# Altium PCB CH32V205RCT-R0.PcbDoc (part 2 of 2)
Units mil, origin at the board's own origin, x right, y up, seen from the top; angles counter-clockwise.
Board outline 3070.87 x 2755.91 mil, 2 copper layers (Top Layer, Bottom Layer); 61 components, 79 nets, 328 pads, 508 vias.
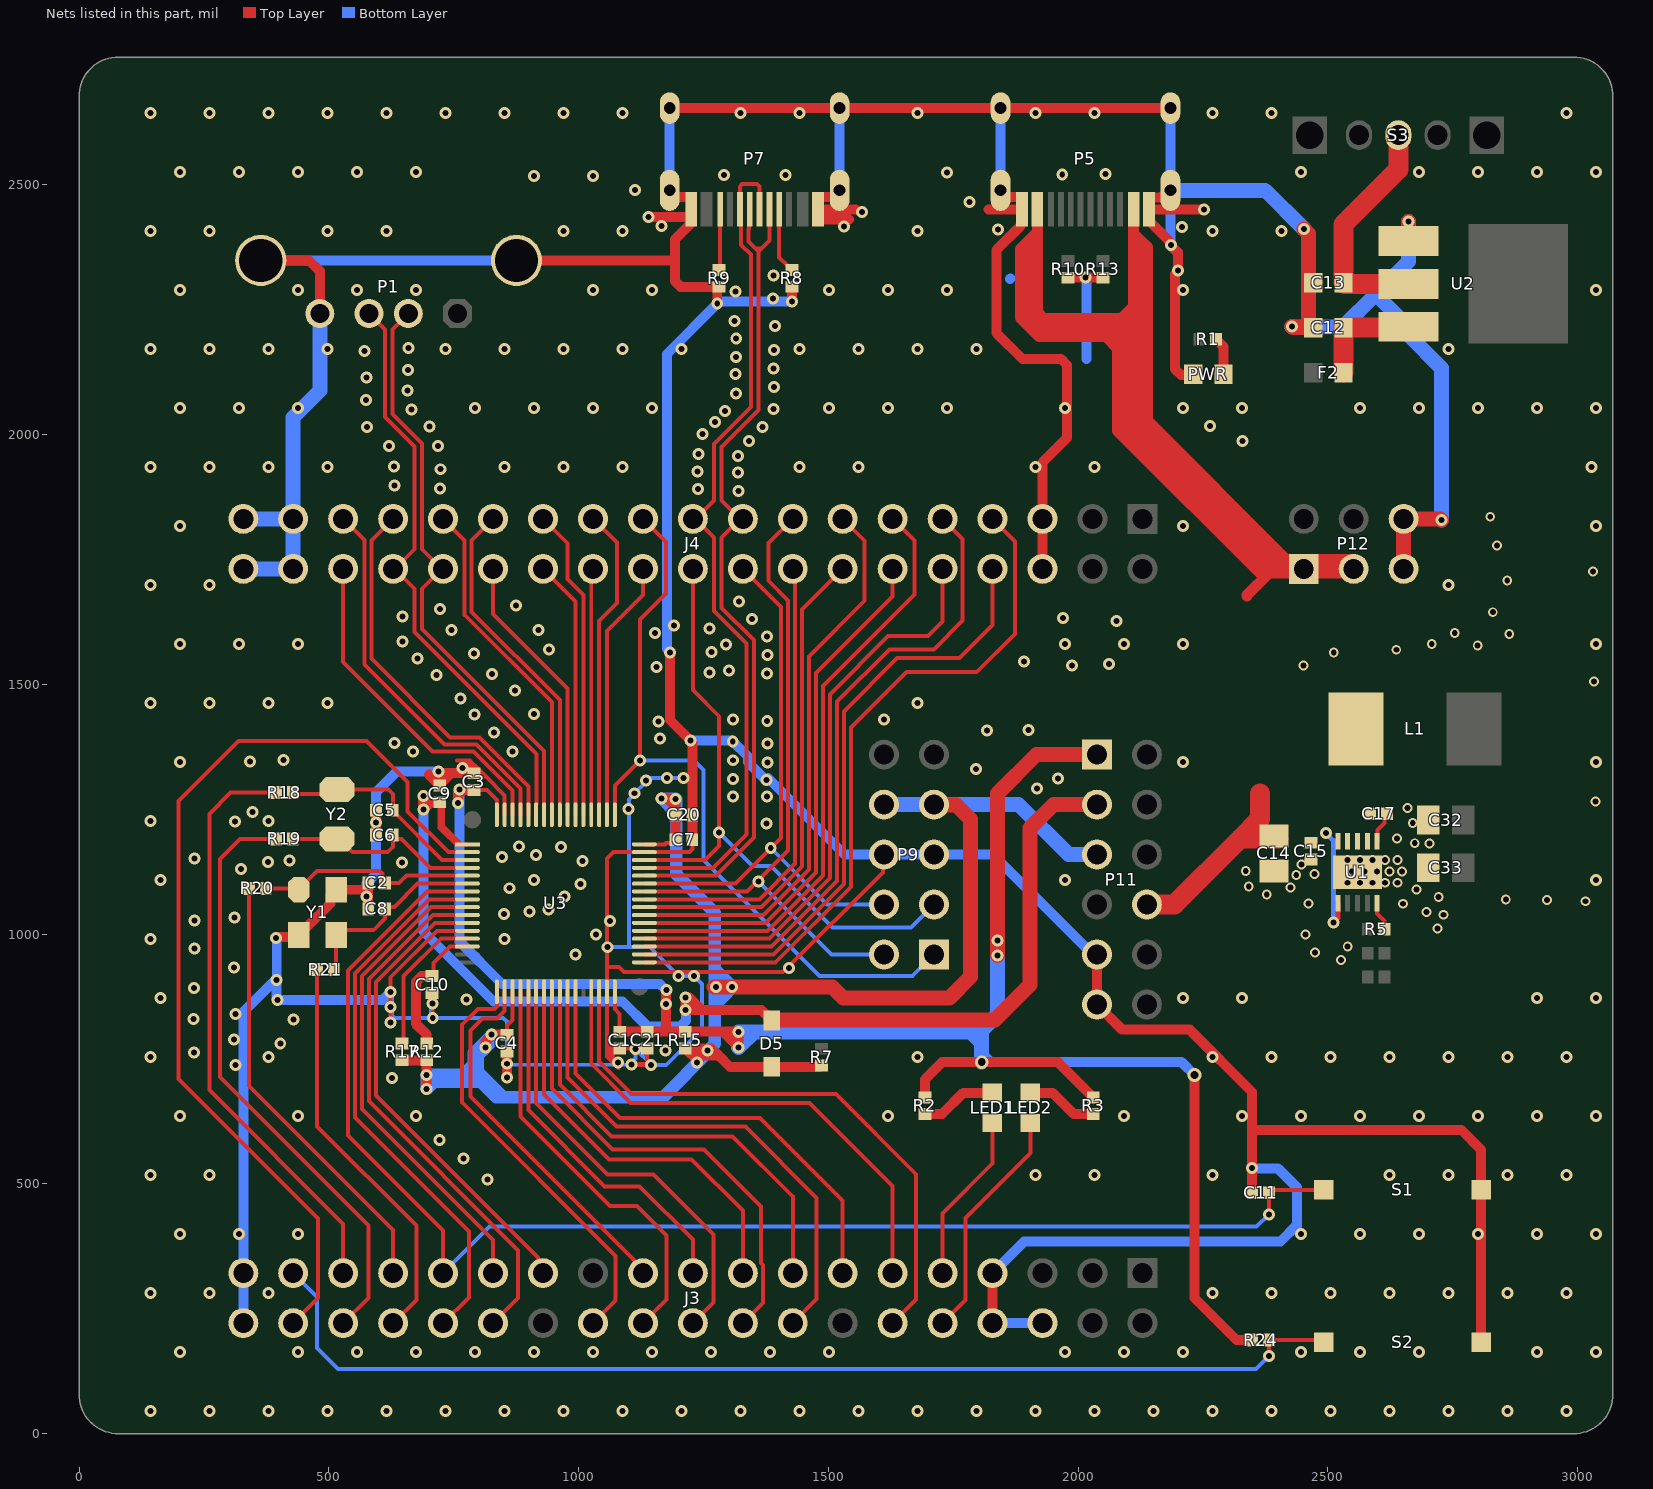
[diagram p2: the nets of this part, all layers, seen from the top]

## Via types
v1: diameter 24, hole 12, Top Layer to Bottom Layer, tented both sides, 451 vias
v2: diameter 19.68, hole 11.81, Top Layer to Bottom Layer, tented both sides, 55 vias
v3: diameter 27.56, hole 15.75, Top Layer to Bottom Layer, tented both sides, 2 vias

## Nets (pads, with @x,y where several pads share a name; then routed paths per layer and width w, separated by ;. In a path a pad name is that pad's centre, name@x,y a point inside that pad or via, vN(x,y) a via of type N, cw(c..) or ccw(c..) an arc to the next point about the centre after c; other vN are vias at no path point) (continued)
GND: C1.1 C2.1 C3.1 C4.1 C5.2 C6.2 C7.1 C8.1 C9.2 C10.2 C11.1 C12.2 C13.2 C14.1 C15.1 C20.2 C21.1 C32.1 C33.1 J3.6 J3.7 J3.8 J3.37 J3.38 J4.5 J4.6 J4.35 J4.36 J4.37 J4.38 P1.0 P1.4 P5.0 P5.A1 P5.B1 P7.0 P7.A1 P7.B1 P9.5 P9.6 P11.9 P11.11 P12.5 P12.6 PWR.2 R5.1 R8.1 R9.1 R10.2 R13.2 S1.2 S2.2 U1.0 U1.5 U2.1 U3.12 U3.31 U3.47 U3.63 Y1.2 Y1.4 | length 18960.8
  Top Layer w8: v1(624.01,823.15) v1(624.01,853.77) v1(624.01,884.38) 624.01,913.71 717.02,1006.72 U3.12@777.42,1006.72 ; C10.2@706.71,882.46 C10.2@707.71,881.46 ; v1(707.35,860.76) 707.35,881.09 C10.2@707.71,881.46 ; C10.2@707.97,881.71 C10.2@707.71,881.46 ; v1(708.16,832.46) 708.16,881.01 C10.2@707.71,881.46 ; 756.7,1347.7 782.44,1347.7 788.13,1342.01 ; v1@765.74,1342.01 788.13,1342.01 ; v1@777.11,1335.81 794.33,1335.81 ; C3.1@787.71,1315.39 788.05,1315.73 814.41,1315.73 ; C3.1@790.46,1322.14 808,1322.14 ; U3.63@852.23,1239.01 852.23,1277.91 814.41,1315.73 ; 1067.58,773.78 1064.67,776.7 ; v1@1068.79,747.24 1069.09,747.54 1069.09,771.21 ; v1@1070.8,744.12 1062.75,752.16 1062.75,770.09 1061.64,771.21 ; C1.1@1077.54,778.11 1076.13,776.7 1064.67,776.7 ; v1@1079.57,732.02 1056.95,754.64 1056.95,775.9 ; v1(1144.92,737.57) 1144.92,741.9 1137.46,749.36 C21.1@1137.46,771.21 C1.1@1082.46,771.21 1069.09,771.21 ; v1(1200.38,916.27) 1204.71,916.27 1212.44,924 ; C7.1@1227.83,1188.79 1227.83,1170.07 1221.97,1164.2 U3.47@1131.75,1164.2 1069.64,1164.2 1056.95,1151.52 1056.95,934.52 ; P9.6@1611.51,1159.23 1609.25,1156.97 1609.25,1123.63 1409.62,924 1212.44,924 ; U1.5@2598.69,1061.67 2598.69,1040.94 2613.15,1026.49 R5.1@2613.15,1011.14 ; 788.13,1342.01 794.33,1335.81 ; 794.33,1335.81 808,1322.14 ; 808,1322.14 814.41,1315.73 ; 1056.95,775.9 1056.95,784.42 ; 1056.95,775.9 1061.64,771.21 ; 1056.95,784.42 U3.31@1056.95,884.68 1056.95,934.52 ; 1056.95,784.42 1064.67,776.7 ; 1056.95,934.52 1080.85,934.52 1091.36,924 1212.44,924 ; 1061.64,771.21 1069.09,771.21
  Top Layer w10: v1(1106.26,738.93) 1143.56,738.93 v1(1144.92,737.57)
  Top Layer w20: P1.0@363.95,2348.74 460.68,2348.74 482.06,2327.36 P1.4@482.06,2242.44 ; v1(393.91,992.72) 394.99,992.72 396.66,994.4 436.18,994.4 Y1.2@440.12,998.34 ; Y1.2@440.12,1002.27 451.77,1013.93 455.71,1013.93 503.27,1061.48 503.27,1077.23 Y1.4@514.92,1088.89 576.83,1088.89 577.12,1089.18 ; v1(575.87,1075.34) 575.87,1076.42 577.12,1077.67 577.12,1089.18 ; C8.1@578.93,1050.5 C2.1@578.93,1102.49 577.12,1100.68 577.12,1089.18 ; C6.2@594.63,1198.4 v1(594.63,1223.31) C5.2@594.63,1248.23 ; 700.19,1319.34 719.21,1300.33 719.21,1299.34 721.02,1297.53 C9.2@721.54,1297.53 ; C3.1@790.46,1322.14 744.8,1322.14 ; v1(856.51,713.19) 856.6,713.28 v1(856.6,740.55) C4.1@856.6,765.34 ; P1.0@875.77,2348.74 1192.35,2348.74 1192.74,2349.13 ; v1(1140.16,2435.5) P7.B1@1223.76,2435.5 ; P7.0@1182.46,2489.01 1182.46,2484.21 1191.4,2475.27 1223.76,2475.27 P7.B1@1223.76,2449.01 ; P7.0@1182.46,2653.57 P7.0@1522.61,2653.57 P5.0@1844.77,2653.57 P5.0@2184.93,2653.57 ; v1(1183.15,1563.78) 1183.15,1428.76 v1(1224.25,1387.66) 1224.25,1386.58 1227.85,1382.98 C7.1@1227.83,1188.79 ; v1(1277.7,2262.49) 1277.7,2292.38 1278.5,2293.18 1278.5,2294.17 R9.1@1280.31,2295.98 ; R9.1@1281.3,2295.98 R9.1@1280.31,2295.98 ; v1(1427.3,2266.14) R8.1@1427.3,2295.98 ; P7.0@1522.61,2489.01 1522.61,2484.21 1513.67,2475.27 1481.31,2475.27 1479.5,2473.46 P7.A1@1479.5,2450.82 ; 1541.58,2430.78 1481.31,2430.78 1479.5,2432.59 P7.A1@1479.5,2450.82 ; 1554.8,2450.82 P7.A1@1479.5,2450.82 ; 1821.15,2450.82 P5.B1@1887.88,2450.82 ; J3.8@1828.86,221.33 J3.7@1828.86,321.33 ; P5.0@1844.77,2489.01 1844.77,2484.21 1853.72,2475.27 1886.07,2475.27 1887.88,2473.46 P5.B1@1887.88,2450.82 ; J4.6@1928.86,1731.33 J4.5@1928.86,1831.33 1928.86,1944.52 1978.02,1993.69 1978.02,2048.05 1975.05,2051.02 1975.05,2051.79 1976.13,2052.87 1975.05,2053.95 1975.05,2054.72 1978.02,2057.69 1978.02,2139.48 1966.31,2151.19 1888.72,2151.19 1836.83,2203.09 1836.83,2369.98 1886.07,2419.22 1886.07,2449.01 P5.B1@1887.88,2450.82 ; R10.2@1979.85,2314.05 v1(2014.85,2314.05) R13.2@2049.85,2314.05 ; P11.9@2037.77,959.23 P11.11@2037.77,859.23 2088.25,808.75 2223.6,808.75 2348.37,683.98 2348.37,607.9 ; P5.0@2167.41,2476.41 2166.16,2475.16 2143.63,2475.16 2141.82,2473.35 P5.A1@2141.82,2450.82 ; PWR.2@2230.68,2121.02 2224.15,2121.02 2222.37,2119.24 2205.8,2119.24 2194.09,2130.95 2194.09,2321.52 2199.59,2327.02 2199.59,2364.38 2186.49,2377.48 2186.49,2380.09 2187.03,2380.63 2185.5,2380.63 2184.96,2381.17 2184.96,2385.04 2143.63,2426.37 2143.63,2449.01 P5.A1@2141.82,2450.82 ; v1(2251.87,2450.82) P5.A1@2141.82,2450.82 ; C11.1@2348.57,482.24 2348.37,482.45 v1(2348.37,531.83) 2348.37,607.9 ; S2.2@2807.07,182.96 S1.2@2807.07,488.17 2807.07,568.18 2767.34,607.9 2348.37,607.9 ; C9.2@721.54,1297.53 C9.2@722,1297.53 722.99,1297.53 724.8,1299.34 724.8,1302.14 744.8,1322.14 ; C9.2@721.54,1297.53 719.73,1299.34 v1(719.73,1325.34) 720.81,1325.34 724.01,1322.14 744.8,1322.14 ; 1192.74,2349.13 1192.74,2390.56 1223.76,2421.58 P7.B1@1223.76,2435.5 ; 1192.74,2349.13 1192.74,2307.7 1204.45,2295.98 R9.1@1280.31,2295.98 ; P7.B1@1223.76,2435.5 P7.B1@1223.76,2449.01 ; P7.B1@1223.76,2435.5 1225.57,2437.31 P7.B1@1225.57,2450.82 P7.B1@1223.76,2449.01
  Top Layer w30: v1(2427.8,2216.27) 2430.01,2214.06 2461.23,2214.06 2461.23,2402.27 v1(2452.09,2411.4) ; P12.5@2651.79,1731.33 P12.6@2651.79,1831.33 2725.14,1831.33 v1(2727.6,1828.87) ; U2.1@2661.23,2387.95 v1(2661.23,2426.51)
  Bottom Layer w8: v1@624.01,882.38 627.07,879.32 627.07,836.89 631.75,832.2 v1@704.54,832.2 ; v1@705.1,831.65 v1@704.54,832.2 ; v1(707.35,860.76) 704.29,857.7 704.29,832.46 v1@704.54,832.2 ; v1(708.16,832.46) 849.07,832.46 856.6,824.93 v1(856.6,740.55) 858.6,738.55 1105.89,738.55 1105.89,742.88 1114.19,751.19 v1(1114.19,770.39) 1147.01,737.57 1175.04,737.57 1247.09,809.62 1247.09,900.1 v1(1230.7,916.49) 1200.6,916.49 v1(1200.38,916.27) 1142.86,973.78 1100.65,973.78 ; v1(1058.43,973.78) 1100.65,973.78 ; v1(1209.7,1312.57) v1(1177.2,1312.57) 1144.58,1312.57 1136.88,1304.87 1135.12,1304.87 v1(1112.32,1282.06) 1112.32,1281.05 1100.65,1269.38 1100.65,973.78
  Bottom Layer w20: J3.38@328.86,221.33 J3.37@328.86,321.33 328.86,844.17 v1@394.22,909.53 ; P1.0@363.95,2348.74 P1.0@875.77,2348.74 ; v1(393.91,992.72) 394.67,991.96 394.67,989.13 395.87,987.93 v1@395.87,909.41 ; v1(395.64,908.1) 395.64,870.71 397.03,869.32 v1(397.03,868.23) 607.85,868.23 v1(624.01,884.38) ; v1(575.87,1075.34) 575.87,1101.38 594.63,1120.15 v1(594.63,1223.31) 594.63,1283.98 635.99,1325.34 v1(719.73,1325.34) ; P7.0@1182.46,2489.01 P7.0@1182.46,2653.57 ; v1(1183.15,1563.78) 1183.15,1564.86 1176.84,1571.17 1176.84,2161.63 v1(1277.7,2262.49) 1281.35,2266.14 v1(1427.3,2266.14) ; v1(1224.25,1387.66) 1305.86,1387.66 1307.64,1385.88 v1(1308.72,1385.88) 1339.05,1355.55 1339.05,1344.29 v1@1375.07,1308.28 ; v1@1379.13,1312.34 1532.24,1159.23 P9.6@1611.51,1159.23 P9.5@1711.51,1159.23 1829.39,1159.23 2029.39,959.23 P11.9@2037.77,959.23 P11.11@2037.77,859.23 ; P7.0@1522.61,2489.01 P7.0@1522.61,2653.57 ; J3.8@1828.86,221.33 J3.6@1928.86,221.33 ; J3.7@1828.86,321.33 1892.08,384.54 2405.16,384.54 2437.79,417.18 2437.79,493.32 2400.64,530.47 2349.72,530.47 v1(2348.37,531.83) ; P5.0@1844.77,2489.01 P5.0@1844.77,2653.57 P5.0@2184.93,2653.57 P5.0@2184.93,2489.01 2184.93,2379.03 2199.59,2364.38 v1(2199.59,2328.11) ; 1863.35,2311.84 1864.37,2312.86 ; v1@2012.58,2312.86 2013.77,2314.05 v1(2014.85,2314.05) 2014.85,2312.96 2017.12,2310.7 2017.12,2151.19
  Bottom Layer w30: J4.38@328.86,1731.33 J4.36@428.86,1731.33 J4.35@428.86,1831.33 ; J4.37@328.86,1831.33 J4.35@428.86,1831.33 ; P1.4@482.06,2242.44 482.06,2087.95 428.86,2034.74 J4.35@428.86,1831.33 ; P5.0@2184.93,2489.01 2374.49,2489.01 v1(2452.09,2411.4) ; v1(2427.8,2216.27) 2428.55,2215.52 2530.55,2215.52 2595.89,2280.85 ; P12.5@2651.79,1731.33 P12.6@2651.79,1831.33 ; v1(2661.23,2426.51) 2661.23,2346.19 2595.89,2280.85 ; v1(2727.6,1828.87) 2727.6,2133.06 2661.75,2198.91 2661.75,2215 2595.89,2280.85
  other v1: 143.58,45 261.69,45 379.8,45 497.91,45 616.02,45 734.13,45 852.24,45 970.35,45 1088.46,45 1206.57,45 1324.68,45 1442.79,45 1560.9,45 1679.01,45 1797.12,45 1915.23,45 2033.34,45 2151.45,45 2269.56,45 2387.67,45 2505.78,45 2623.89,45 2742,45 2860.11,45 2978.22,45 202.63,163.11 438.85,163.11 556.96,163.11 675.07,163.11 793.19,163.11 911.3,163.11 1029.41,163.11 1147.52,163.11 1265.63,163.11 1383.74,163.11 1501.85,163.11 1974.29,163.11 2092.4,163.11 2210.51,163.11 2446.73,163.11 2564.84,163.11 2682.95,163.11 2919.17,163.11 3037.28,163.11 143.58,281.22 261.69,281.22 379.8,281.22 2269.56,281.22 2387.67,281.22 2505.78,281.22 2623.89,281.22 2742,281.22 2860.11,281.22 2978.22,281.22 202.63,399.33 320.74,399.33 438.85,399.33 2446.73,399.33 2564.84,399.33 2682.95,399.33 2801.06,399.33 2919.17,399.33 3037.28,399.33 817.91,508.79 143.58,517.44 261.69,517.44 1915.23,517.44 2033.34,517.44 2269.56,517.44 2623.89,517.44 2742,517.44 2860.11,517.44 2978.22,517.44 769.64,551.02 721.98,587.83 202.63,635.55 438.85,635.55 675.07,635.55 1619.96,635.55 2092.4,635.55 2328.62,635.55 2446.73,635.55 2564.84,635.55 2682.95,635.55 2801.06,635.55 2919.17,635.55 3037.28,635.55 626.93,712.04 312.99,738.13 1079.48,743.07 143.58,753.66 379.8,753.66 1679.01,753.66 2269.56,753.66 2387.67,753.66 2505.78,753.66 2623.89,753.66 2742,753.66 2860.11,753.66 2978.22,753.66 230.6,763.26 1173.84,766.98 402.88,781.08 310.61,789.29 429.76,829.03 229.48,829.99 312.99,840.06 775.97,868.7 163.33,871.77 2210.51,871.77 2328.62,871.77 2919.17,871.77 3037.28,871.77 230.23,891.87 1421.05,931.98 310.21,933.26 994.27,959.16 230.97,971.27 143.58,989.88 852.24,989.88 1034.91,999.06 1063.24,1026.65 230.97,1027.19 311.57,1032.99 850.35,1040.81 901.43,1045.66 940.21,1049.76 972.27,1075.49 861.54,1091.89 1003.96,1100.09 163.33,1107.99 911.3,1107.99 1974.29,1107.99 3037.28,1107.99 324.62,1130.07 646.95,1143.01 378.56,1144.74 1007.69,1146.33 421.28,1147.76 231.49,1151.53 847,1154.53 914.48,1158.26 965.19,1174.66 881.3,1175.78 1376.7,1221.58 312.01,1225.25 143.58,1226.1 379.8,1226.1 347.23,1244.33 1100.17,1250.77 1309.5,1275.6 1377,1275.2 1917.81,1291.96 1134.78,1307.1 1376.07,1308.28 1309.56,1310.28 1960.13,1311.42 1795.23,1330.61 767.67,1332.14 1378.39,1343.88 202.63,1344.21 2210.51,1344.21 3037.28,1344.21 342.78,1345.36 409.86,1348.61 1309.2,1348.12 668.4,1365.57 867.43,1365.83 1378.39,1381.39 631.79,1382.33 1163.57,1391.58 831.08,1403.48 1817.9,1407.94 1900.46,1409.1 1159.89,1426.1 1377.78,1427.02 1309.2,1429.45 1611.51,1429.45 791.97,1439.91 910.9,1440.93 143.58,1462.32 261.69,1462.32 379.8,1462.32 497.91,1462.32 1679.01,1462.32 763.46,1471.44 872.44,1487.64 715.95,1518.96 826.65,1520.61 1376.88,1522.08 1262.47,1523.77 1301.28,1527.82 1155.75,1535.19 1988.26,1538.17 2061.51,1541.08 1891.74,1545.73 677.93,1551.35 1378.57,1559.21 790.93,1561.82 1265.85,1565.28 940.69,1570.25 1295.55,1579.79 202.63,1580.43 320.74,1580.43 438.85,1580.43 1974.29,1580.43 2092.4,1580.43 2210.51,1580.43 3037.28,1580.43 647.15,1585.63 1376.88,1595.99 1153.44,1602.38 746.05,1608.53 919.69,1608.54 1262.13,1612.19 1190.73,1617.57 2076.63,1627.13 1346.84,1630.75 1970.23,1632.94 647.15,1636 722.24,1650.65 875.23,1657.94 1320.86,1666.19 143.58,1698.54 261.69,1698.54 2742,1698.54 202.63,1816.65 2210.51,1816.65 3037.28,1816.65 1320.72,1887.6 1239.41,1891.39 722.86,1892.21 631.78,1898.11 1318.87,1924.17 1238.45,1926.48 724.09,1930.67 143.58,1934.76 261.69,1934.76 379.8,1934.76 497.91,1934.76 852.24,1934.76 970.35,1934.76 1088.46,1934.76 1442.79,1934.76 1560.9,1934.76 1915.23,1934.76 2033.34,1934.76 3028.22,1934.76 630.67,1935.74 1319.08,1957.58 1240.54,1961.04 620.16,1977.24 718.59,1977.69 1341.13,1987.53 2329.16,1987.48 1248.48,2001.68 576.44,2014.87 1368.63,2015.03 702.11,2016.15 2264.43,2017.35 1272.77,2025.03 1293.31,2047.33 665.47,2050.35 1390.54,2051.13 202.63,2052.87 320.74,2052.87 438.85,2052.87 793.19,2052.87 911.3,2052.87 1029.41,2052.87 1147.52,2052.87 1501.85,2052.87 1619.96,2052.87 1738.07,2052.87 1974.29,2052.87 2210.51,2052.87 2328.62,2052.87 2564.84,2052.87 2682.95,2052.87 2801.06,2052.87 2919.17,2052.87 3037.28,2052.87 574.78,2069.66 1314.78,2081.82 657.53,2088.2 1390.97,2094.96 575.33,2114.49 1314.43,2120.89 658.14,2129.72 1390.12,2132.35 1315.14,2155.73 572.01,2167.61 1390.98,2169.73 143.58,2170.98 261.69,2170.98 379.8,2170.98 497.91,2170.98 734.13,2170.98 852.24,2170.98 970.35,2170.98 1088.46,2170.98 1206.57,2170.98 1442.79,2170.98 1560.9,2170.98 1679.01,2170.98 1797.12,2170.98 2742,2170.98 659.98,2173.07 1315.72,2192.57 1393.49,2217.75 1312.36,2227.26 1389.58,2272.02 1314.6,2286.57 202.63,2289.09 438.85,2289.09 556.96,2289.09 675.07,2289.09 1029.41,2289.09 1147.52,2289.09 1501.85,2289.09 1619.96,2289.09 1738.07,2289.09 2210.51,2289.09 3037.28,2289.09 1390.69,2318.46 2185.72,2379.32 143.58,2407.2 261.69,2407.2 497.91,2407.2 616.02,2407.2 970.35,2407.2 1088.46,2407.2 1679.01,2407.2 2269.56,2407.2 2407.67,2407.2 1839.92,2410.17 2207.96,2415.2 1531.3,2416.21 1165.89,2417.96 1567.55,2446.03 1782.53,2465.41 1113.27,2489.29 911.3,2517.31 1029.41,2517.31 1291.59,2519.45 1414.37,2519.45 1968.34,2520.66 2055.15,2521.37 1738.07,2524.85 202.63,2525.31 320.74,2525.31 438.85,2525.31 556.96,2525.31 675.07,2525.31 2446.73,2525.31 2682.95,2525.31 2801.06,2525.31 2919.17,2525.31 3037.28,2525.31 143.58,2643.42 261.69,2643.42 379.8,2643.42 497.91,2643.42 616.02,2643.42 734.13,2643.42 852.24,2643.42 970.35,2643.42 1088.46,2643.42 1324.68,2643.42 1442.79,2643.42 1679.01,2643.42 1915.23,2643.42 2033.34,2643.42 2269.56,2643.42 2387.67,2643.42 2978.22,2643.42
  other v2: 2526.62,948.45 2474.2,963.19 2539.72,975.48 2455.36,999.5 2719.82,1011.53 2731.79,1038.8 2697.25,1044.47 2650.53,1060.84 2461.37,1061.2 3016.01,1065.89 2938.76,1068.5 2856.29,1069.37 2721.9,1074.69 2377.75,1079.59 2677.45,1089.64 2425.3,1093.57 2341.72,1095.65 2538.98,1102.92 2564.12,1102.92 2589.27,1102.92 2614.41,1102.92 2639.55,1102.92 2436.71,1118.35 2473.29,1120.32 2547.94,1125.6 2573.08,1125.6 2598.22,1125.6 2623.37,1125.6 2648.51,1125.6 2335.65,1126.47 2447.33,1139.2 2539.11,1148.28 2564.25,1148.28 2589.4,1148.28 2614.54,1148.28 2639.68,1148.28 2703.81,1181.68 2673.91,1182.08 2638.33,1191.79 2669.98,1222.2 2659.75,1252.49 3035.94,1265.54 3032.81,1505.66 2451.29,1538.03 2511.84,1564.13 2637.13,1569.35 2799.99,1577.7 2708.12,1580.83 2863.13,1601.19 2754.06,1602.76 2830.27,1644.52 2859.09,1708.26 3030.72,1725.95 2838.62,1778.15 2825.05,1835.57
KEY: J3.35 R24.1 S2.1 | length 2246.9
  Top Layer w8: v1(2382.04,155.25) R24.1@2382.04,187.28 2487.79,187.28 S2.1@2492.11,182.96
  Bottom Layer w8: J3.35@428.86,321.33 476.91,273.28 476.91,171.2 518.47,129.63 2356.42,129.63 v1(2382.04,155.25)
LED1: J3.9 LED1.2 | length 341.6
  Top Layer w8: J3.9@1728.86,321.33 1728.86,441.1 1828.23,540.48 LED1.2@1828.23,621.8
LED2: J3.10 LED2.2 | length 473.2
  Top Layer w8: J3.10@1728.86,221.33 1774.99,267.46 1774.99,431.98 1904.5,561.49 LED2.2@1904.5,621.8
NetC12_1: C12.1 F2.2 U2.3 | length 220.7
  Top Layer w40: F2.2@2531.31,2124.06 C12.1@2531.31,2214.06 2659.33,2214.06 U2.3@2661.23,2215.95
NetC13_1: C13.1 S3.1 U2.2 | length 471.7
  Top Layer w40: S3.1@2641.13,2599.52 2641.13,2530.79 2531.31,2420.97 C13.1@2531.31,2304.06 2533.41,2301.95 U2.2@2661.23,2301.95
NetC17_1: C17.1 U1.6 | length 59.2
  Top Layer w8: U1.6@2598.69,1185.69 2599.26,1186.25 2599.26,1208.02 2613.78,1222.54 2613.78,1237.41 C17.1@2612.94,1238.26
NetC17_2: C17.2 L1.1 U1.7 U1.8
NetLED1_1: LED1.1 R2.2 | length 152.5
  Top Layer w20: R2.2@1693.43,639.68 1727.44,639.68 1770.19,682.43 LED1.1@1828.23,682.43
NetLED2_1: LED2.1 R3.2 | length 143.5
  Top Layer w20: LED2.1@1904.5,682.43 1948.67,682.43 1991.42,639.68 R3.2@2030.28,639.68
NetP7_A5: P7.A5 R8.2 | length 132.5
  Top Layer w8: P7.A5@1401.75,2450.82 1401.75,2355 1418.5,2338.24 1418.5,2337.25 1426.31,2329.44 R8.2@1427.3,2329.44
NetP7_B5: P7.B5 R9.2 | length 122.3
  Top Layer w8: R9.2@1281.3,2329.44 1283.64,2331.78 P7.B5@1283.64,2450.82
NetPWR_1: PWR.1 R1.1 | length 76.8
  Top Layer w20: R1.1@2276.31,2191.02 2276.31,2190.03 2278.12,2188.22 2279.1,2188.22 2291.31,2176.02 PWR.1@2291.31,2121.02
NRST: C11.2 J3.29 S1.1 U3.7 | length 2846.8
  Top Layer w8: J3.29@728.86,321.33 728.86,406.77 538.77,596.87 538.77,927.46 696.77,1085.46 U3.7@777.42,1085.46 ; v1(2382.04,438.82) C11.2@2382.04,482.24 2387.96,488.17 S1.1@2492.11,488.17
  Bottom Layer w8: J3.29@728.86,321.33 821.82,414.28 2357.51,414.28 v1(2382.04,438.82)
PA2: J3.24 U3.17 | length 857.7
  Top Layer w8: U3.17@836.48,884.68 836.48,855.23 831.79,850.54 798.29,850.54 767.21,819.46 767.21,663 1074.31,355.9 1074.31,266.77 J3.24@1028.86,221.33
PA3: J3.21 U3.18 | length 751.8
  Top Layer w8: U3.18@852.23,884.68 852.23,846.49 837.25,831.51 807.94,831.51 783.81,807.39 783.81,675.18 1128.86,330.14 J3.21@1128.86,321.33
PA4: J3.22 U3.20 | length 835.3
  Top Layer w8: U3.20@883.72,884.68 883.72,863.68 883.63,863.58 883.63,635.34 1062.88,456.08 1116.61,456.08 1175.81,396.88 1175.81,268.27 J3.22@1128.86,221.33
PA5: J3.19 U3.21 | length 740.8
  Top Layer w8: U3.21@899.47,884.68 899.47,648.04 1052.3,495.2 1122.35,495.2 1228.86,388.69 J3.19@1228.86,321.33
PA6: J3.20 U3.22 | length 881.3
  Top Layer w8: U3.22@915.22,884.68 915.22,661.86 1058.12,518.96 1149.94,518.96 1270.16,398.74 1270.16,262.62 J3.20@1228.86,221.33
PA7: J3.17 U3.23 | length 824.9
  Top Layer w8: U3.23@930.97,884.68 930.97,679.13 1061.03,549.07 1226.2,549.07 1328.86,446.41 J3.17@1328.86,321.33
PA8: J4.16 U3.41 | length 923.3
  Top Layer w8: U3.41@1131.75,1069.72 1362.09,1069.72 1433.36,1140.98 1433.36,1726.83 J4.16@1428.86,1731.33
PA9: J4.15 P9.2 U3.42 | length 1333.4
  Top Layer w8: U3.42@1131.75,1085.46 1337.68,1085.46 1419.36,1167.14 1419.36,1668.26 1380.14,1707.48 1380.14,1782.61 J4.15@1428.86,1831.33
  Bottom Layer w8: v1(1360.56,1105.04) 1506.37,959.23 P9.2@1611.51,959.23
PA10: J4.18 P9.4 U3.43 | length 1155.1
  Top Layer w8: U3.43@1131.75,1101.21 1313.89,1101.21 1405.09,1192.41 1405.09,1655.1 J4.18@1328.86,1731.33
  Bottom Layer w8: v1(1384.79,1172.11) 1497.67,1059.23 P9.4@1611.51,1059.23
PA11: J4.17 P7.A7 P7.B7 U3.44 | length 1715.6
  Top Layer w8: U3.44@1131.75,1116.96 1152.75,1116.96 1153.13,1117.33 1275.09,1117.33 1351.07,1193.31 1351.07,1588.44 1286.36,1653.15 1286.36,1794.2 J4.17@1323.48,1831.33 ; J4.17@1328.86,1831.33 J4.17@1323.48,1831.33 ; P7.A7@1342.69,2450.82 1340.79,2448.91 1340.79,2411.27 1340.35,2410.84 1340.35,2386.13 1354.13,2372.35 ; 1364.67,2373.01 1354.79,2373.01 1354.13,2372.35 ; P7.B7@1382.06,2450.82 1382.06,2388.47 1360.04,2366.44 ; J4.17@1323.48,1831.33 1322.92,1831.33 1286.36,1867.89 1286.36,1975.28 1360.04,2048.96 1360.04,2366.44 ; 1354.13,2372.35 1360.04,2366.44
PA12: J4.19 P7.A6 P7.B6 U3.45 | length 1721.8
  Top Layer w8: U3.45@1131.75,1132.71 1152.75,1132.71 1153.13,1132.33 1268.87,1132.33 1336.07,1199.53 1336.07,1582.23 1271.36,1646.94 1271.36,1794.2 J4.19@1234.24,1831.33 ; J4.19@1228.86,1831.33 J4.19@1234.24,1831.33 ; P7.B6@1323.01,2450.82 1324.91,2448.85 1324.91,2411.27 1325.35,2410.84 1325.35,2379.92 1345.04,2360.23 1345.04,2055.17 1271.36,1981.5 1271.36,1867.89 1234.8,1831.33 J4.19@1234.24,1831.33 ; P7.B6@1323.01,2450.82 1323.01,2496.95 1327.69,2501.63 1357.52,2501.63 1362.38,2496.78 P7.A6@1362.38,2450.82
PA13: J4.20 P9.3 U3.46 | length 1265.7
  Top Layer w8: U3.46@1131.75,1148.46 1253.03,1148.46 1281.48,1176.91 1281.48,1436.19 1228.86,1488.8 J4.20@1228.86,1731.33
  Bottom Layer w8: v1(1281.48,1203.56) 1348.54,1136.51 1384.97,1136.51 1508.28,1013.2 1665.48,1013.2 P9.3@1711.51,1059.23
PA14: J4.21 P9.1 U3.49 | length 1545.2
  Top Layer w8: U3.49@1072.7,1239.01 1072.7,1297.78 v1(1122.93,1348.01) 1122.93,1630.31 1174.94,1682.32 1174.94,1785.24 J4.21@1128.86,1831.33
  Bottom Layer w8: v1(1122.93,1348.01) 1230.71,1348.01 1249.73,1328.99 1249.73,1148.39 1482.33,915.79 1668.07,915.79 P9.1@1711.51,959.23
PA15: J4.22 U3.50 | length 522.1
  Top Layer w8: U3.50@1056.95,1239.01 1056.95,1606.67 1128.86,1678.58 J4.22@1128.86,1731.33
PB0: J3.16 U3.26 | length 1040.5
  Top Layer w8: U3.26@978.21,884.68 978.21,712.7 1076.4,614.51 1333.79,614.51 1476.77,471.53 1476.77,269.24 J3.16@1428.86,221.33
PB1: J3.13 U3.27 | length 949.3
  Top Layer w8: U3.27@993.96,884.68 993.96,721.02 1083.05,631.93 1363.69,631.93 1528.86,466.76 J3.13@1528.86,321.33
PB3: J4.28 U3.55 | length 554.2
  Top Layer w8: J4.28@828.86,1731.33 828.86,1640.7 978.21,1491.35 U3.55@978.21,1239.01
PB4: J4.27 U3.56 | length 683.2
  Top Layer w8: J4.27@828.86,1831.33 785.97,1788.43 785.97,1645.18 962.46,1468.68 U3.56@962.46,1239.01
PB5: J4.29 U3.57 | length 682.6
  Top Layer w8: J4.29@728.86,1831.33 771.97,1788.22 771.97,1639.38 946.71,1464.63 U3.57@946.71,1239.01
PB6: J4.32 P1.3 U3.59 | length 1178.4
  Top Layer w8: P1.3@580.49,2242.44 612.36,2210.57 612.36,2034.96 671.36,1975.96 671.36,1770.54 632.14,1731.33 J4.32@631.46,1731.33 ; J4.32@628.86,1731.33 J4.32@631.46,1731.33 ; U3.59@915.22,1239.01 915.22,1260.01 915.59,1260.38 915.59,1360.6 671.36,1604.83 671.36,1691.43 J4.32@631.46,1731.33
PB7: J4.30 P1.2 U3.58 | length 1178.4
  Top Layer w8: P1.2@659.23,2242.44 627.36,2210.57 627.36,2041.17 686.36,1982.17 686.36,1770.54 725.58,1731.33 J4.30@726.26,1731.33 ; J4.30@728.86,1731.33 J4.30@726.26,1731.33 ; U3.58@930.97,1239.01 930.97,1260.01 930.59,1260.38 930.59,1366.81 686.36,1611.05 686.36,1691.43 J4.30@726.26,1731.33
PB8: J4.31 U3.60 | length 774.6
  Top Layer w8: J4.31@628.86,1831.33 585.44,1787.9 585.44,1551.47 742.93,1393.98 801.31,1393.98 899.47,1295.82 U3.60@899.47,1239.01
PB9: J4.33 U3.61 | length 776.9
  Top Layer w8: J4.33@528.86,1831.33 571.44,1788.75 571.44,1551.06 571.44,1539.95 731.41,1379.98 742.53,1379.98 795.51,1379.98 883.72,1291.77 U3.61@883.72,1239.01
PB10: J3.11 U3.29 | length 1023.3
  Top Layer w8: U3.29@1025.45,884.68 1025.45,740.74 1103.89,662.3 1462.34,662.3 1628.86,495.79 J3.11@1628.86,321.33
PB11: J3.12 U3.30 | length 1185.6
  Top Layer w8: U3.30@1041.2,884.68 1041.2,744.79 1105.77,680.23 1515.09,680.23 1675.99,519.33 1675.99,268.46 J3.12@1628.86,221.33
PB12: J4.7 U3.33 | length 1450.1
  Top Layer w8: U3.33@1131.75,943.73 1394.5,943.73 1545.36,1094.59 1545.36,1413.79 1656.2,1524.63 1797.16,1524.63 1873.86,1601.33 1873.86,1786.33 J4.7@1828.86,1831.33
PB13: J4.8 U3.34 | length 1285.1
  Top Layer w8: U3.34@1131.75,959.48 1390.45,959.48 1531.36,1100.39 1531.36,1446.04 1637.7,1552.37 1762.21,1552.37 1828.86,1619.03 J4.8@1828.86,1731.33
PB14: J4.9 U3.35 | length 1338
  Top Layer w8: U3.35@1131.75,975.23 1266.74,975.23 1266.78,975.18 1386.35,975.18 1517.36,1106.19 1517.36,1465.48 1622.04,1570.16 1711.23,1570.16 1768.86,1627.79 1768.86,1791.33 J4.9@1728.86,1831.33
PB15: J4.10 U3.36 | length 1180.9
  Top Layer w8: U3.36@1131.75,990.98 1382.35,990.98 1503.36,1111.99 1503.36,1479.94 1619.91,1596.49 1699.22,1596.49 1728.86,1626.12 J4.10@1728.86,1731.33
PC0: J3.30 U3.8 | length 1102.1
  Top Layer w8: J3.30@728.86,221.33 780.62,273.09 780.62,404.85 552.77,632.7 552.77,921.67 700.82,1069.72 U3.8@777.42,1069.72
PC1: J3.27 U3.9 | length 971
  Top Layer w8: U3.9@777.42,1053.97 704.87,1053.97 566.77,915.87 566.77,649.81 828.86,387.72 J3.27@828.86,321.33
PC2: J3.28 U3.10 | length 1083
  Top Layer w8: U3.10@777.42,1038.22 708.92,1038.22 580.77,910.07 580.77,665.53 879.29,367.01 879.29,271.75 J3.28@828.86,221.33
PC3: J3.25 U3.11 | length 952.9
  Top Layer w8: U3.11@777.42,1022.47 712.97,1022.47 594.77,904.27 594.77,676.57 918.91,352.43 918.91,331.28 J3.25@928.86,321.33
PC4: J3.18 U3.24 | length 962.1
  Top Layer w8: U3.24@946.71,884.68 946.71,690.55 1068.06,569.21 1251.23,569.21 1365.44,455 1365.44,341.32 1368.86,337.89 1368.86,261.33 J3.18@1328.86,221.33
PC5: J3.15 U3.25 | length 898.3
  Top Layer w8: U3.25@962.46,884.68 962.46,699.33 1066.42,595.37 1308.37,595.37 1428.86,474.88 J3.15@1428.86,321.33
PC6: J4.11 U3.37 | length 1211.1
  Top Layer w8: U3.37@1131.75,1006.72 1378.3,1006.72 1489.36,1117.79 1489.36,1496.53 1672.56,1679.73 1672.56,1787.63 J4.11@1628.86,1831.33
PC7: J4.12 U3.38 | length 1056.8
  Top Layer w8: U3.38@1131.75,1022.47 1374.25,1022.47 1475.36,1123.58 1475.36,1522.37 1628.86,1675.87 J4.12@1628.86,1731.33
PC8: J4.13 U3.39 | length 1133.8
  Top Layer w8: U3.39@1131.75,1038.22 1370.2,1038.22 1461.36,1129.38 1461.36,1556.04 1572.95,1667.63 1572.95,1787.23 J4.13@1528.86,1831.33
PC9: J4.14 U3.40 | length 979.1
  Top Layer w8: U3.40@1131.75,1053.97 1366.15,1053.97 1447.36,1135.18 1447.36,1649.82 J4.14@1528.86,1731.33
PC10: J4.23 U3.51 | length 626.7
  Top Layer w8: J4.23@1028.86,1831.33 1076.59,1783.59 1076.59,1662.49 1041.2,1627.1 U3.51@1041.2,1239.01
PC11: J4.24 U3.52 | length 493.7
  Top Layer w8: U3.52@1025.45,1239.01 1025.45,1727.92 J4.24@1028.86,1731.33
PC12: J4.25 U3.53 | length 625.8
  Top Layer w8: J4.25@928.86,1831.33 977.67,1782.51 977.67,1711.41 1009.71,1679.38 U3.53@1009.71,1239.01
PC13: J3.36 U3.2 | length 1936.5
  Top Layer w8: J3.36@428.86,221.33 478.86,271.33 478.86,431.06 199.54,710.38 199.54,1266.94 319.55,1386.95 575.65,1386.95 657.83,1304.77 657.83,1245.66 739.29,1164.2 U3.2@777.42,1164.2
PC14: J3.33 R18.2 | length 1181.6
  Top Layer w8: R18.2@394.59,1283.28 303.41,1283.28 261.02,1240.9 261.02,687.83 528.86,419.99 J3.33@528.86,321.33
PC15: J3.34 R19.1 | length 1202.2
  Top Layer w8: R19.1@394.59,1190.61 322.36,1190.61 282.12,1150.37 282.12,713.84 579.28,416.68 579.28,271.75 J3.34@528.86,221.33
PD0: J3.31 R20.1 | length 889.8
  Top Layer w8: R20.1@340.33,1091.64 340.33,695.93 628.86,407.4 J3.31@628.86,321.33
PD1: J3.32 R21.1 | length 809.3
  Top Layer w8: R21.1@476.67,929.07 476.67,615.01 675.37,416.32 675.37,267.83 J3.32@628.86,221.33
PD2: J4.26 U3.54 | length 519.3
  Top Layer w8: J4.26@928.86,1731.33 993.96,1666.23 U3.54@993.96,1239.01
PE0: J4.34 U3.62 | length 681
  Top Layer w8: J4.34@528.86,1731.33 528.86,1544.6 707.48,1365.98 789.71,1365.98 867.97,1287.71 U3.62@867.97,1239.01
VBAT: C9.1 D5.1 P11.3 U3.1 | length 2523.9
  Top Layer w8: U3.1@763.84,1181.83 729.11,1216.57 ; U3.1@777.42,1179.95 754.87,1179.95 729.11,1205.71 ; 729.11,1205.71 729.11,1216.57 ; 729.11,1205.71 722,1212.81 C9.1@722,1264.07 729.11,1256.96 729.11,1216.57
  Top Layer w20: v1@688.9,1267.33 688.9,1250.29 v1(689.67,1249.53) 704.21,1264.07 ; v1(689.67,1276.75) 690.75,1276.75 692.75,1274.75 693.52,1274.75 704.21,1264.07 ; 695.64,1264.07 704.21,1264.07 ; C9.1@722,1264.07 704.21,1264.07 ; v1@1213.93,848.33 v1@1214.37,848.77 ; v1(1214.37,872.93) v1@1214.37,849.15 ; D5.1@1385.41,828.53 1385.41,831.88 1380.46,836.82 1377.12,836.82 1365.87,848.07 1245.14,848.07 ; v1@1214.37,848.77 v1@1214.37,849.15 ; v1@1214.37,848.77 v1(1214.37,848.07) 1245.14,848.07 ; v1@1214.37,849.15 1221.01,855.78 1221.01,872.17 1221.77,872.93 1245.14,849.56 1245.14,848.07
  Top Layer w30: D5.1@1385.41,828.53 1833.81,828.53 1903.8,898.52 1903.8,1212.39 1950.64,1259.23 P11.3@2037.77,1259.23
  Bottom Layer w20: v1@689.33,1278.33 689.67,1277.99 v1(689.67,1276.75) v1(689.67,1249.53) 689.67,1005.1 829.62,865.15 1088.04,865.15 1137.66,815.53 1203.9,815.53 1215.62,827.24 v1@1215.62,843.99 ; v1(1214.37,848.07) 1215.14,847.3 1215.14,844.48 v1@1215.62,843.99 ; v1@1215.62,865.7 v1@1215.62,843.99
VBUS_CC: C14.2 C15.2 P5.A4 P5.B4 P11.8 P12.1 P12.3 U1.1 U1.9 U1.10 | length 6206
  Top Layer w10: v1(2511.07,1023.06) 2519.95,1031.94 U1.1@2519.95,1061.67
  Top Layer w22: P5.B4@1918.39,2450.82 1918.39,2405.93 ; P5.A4@2111.31,2450.82 2111.31,2403.07 ; 2337.86,1677 2337.86,1678.57 2381.81,1722.52 ; P12.1@2425.33,1741.76 2416.7,1750.39 ; P12.3@2535.24,1737.6 P12.1@2445.52,1737.6 ; P12.3@2547.28,1750.39 2419.91,1750.39 ; P12.3@2552.67,1722.52 2390.96,1722.52 ; 1902.46,2390 1884.37,2371.91 1884.37,2233.77 1922.13,2196 2055.62,2196 ; 1902.46,2390 1902.46,2241.94 1929.13,2215.28 2089.44,2215.28 ; 1902.46,2390 1918.39,2405.93 ; 1918.39,2405.93 1918.39,2245.76 1931.28,2232.87 2087.22,2232.87 ; 2055.62,2196 2081.25,2196 2095.35,2181.9 2095.35,1991.52 ; 2055.62,2196 2079.26,2172.37 2079.26,2007.61 2095.35,1991.52 ; 2087.22,2232.87 2099.26,2232.87 ; 2087.22,2232.87 2099.26,2244.92 ; 2089.44,2215.28 2099.26,2225.09 2099.26,2232.87 ; 2089.44,2215.28 2107.84,2196.88 2111.31,2196.88 ; 2095.35,1991.52 2364.34,1722.52 2381.81,1722.52 ; 2099.26,2232.87 2099.26,2244.92 ; 2099.26,2232.87 2110.69,2232.87 2111.31,2233.49 ; 2099.26,2244.92 2111.31,2256.96 ; 2111.31,2038.1 2111.31,2196.88 ; 2111.31,2038.1 2111.31,2002.17 2375.88,1737.6 ; 2111.31,2038.1 2126.27,2023.14 ; 2111.31,2196.88 2111.31,2233.49 ; 2111.31,2233.49 2111.31,2256.96 ; 2111.31,2256.96 2111.31,2403.07 ; 2111.31,2403.07 2126.27,2388.1 ; 2126.27,2023.14 2399.02,1750.39 ; 2126.27,2023.14 2126.27,2388.1 ; 2126.27,2023.14 2126.27,2003.9 2379.77,1750.39 2399.02,1750.39 ; 2126.27,2388.1 2138.98,2375.39 2138.98,2028.11 2416.7,1750.39 ; 2375.88,1737.6 2396.89,1737.6 ; 2375.88,1737.6 2386.39,1727.09 ; 2381.81,1722.52 2390.96,1722.52 ; 2381.81,1722.52 2386.39,1727.09 ; 2386.39,1727.09 2390.96,1722.52 ; 2386.39,1727.09 2396.89,1737.6 ; 2396.89,1737.6 2411.81,1737.6 ; 2396.89,1737.6 2404.35,1745.06 ; 2399.02,1750.39 2404.35,1745.06 ; 2399.02,1750.39 2416.7,1750.39 ; 2404.35,1745.06 2411.81,1737.6 ; 2411.81,1737.6 P12.1@2445.52,1737.6 ; 2411.81,1737.6 2418.09,1731.33 P12.1@2451.79,1731.33 P12.1@2445.52,1737.6 ; 2416.7,1750.39 2419.91,1750.39 ; 2419.91,1750.39 2419.97,1750.33 2432.79,1750.33 P12.1@2445.52,1737.6
  Top Layer w40: P11.8@2137.77,1059.23 2192.67,1059.23 2325.04,1191.61 ; 2363.93,1281.87 2363.93,1230.49 2325.04,1191.61 ; C14.2@2400.96,1191.61 2392.02,1191.61 2325.04,1191.61
  Bottom Layer w10: v1(2495.95,1202.39) 2511.07,1187.26 v1(2511.07,1023.06)
VDD: C4.2 C7.2 C20.1 D5.2 P9.7 P9.8 P11.5 R7.2 R12.2 R15.2 R17.1 U3.19 U3.48 | length 4162.3
  Top Layer w8: C4.2@856.6,798.8 856.6,816.74 867.97,828.12 U3.19@867.97,884.68 ; U3.48@1131.75,1179.95 1173.05,1179.95 1175.34,1182.24 1187.82,1182.24 C7.2@1194.37,1188.79
  Top Layer w20: R17.1@646.72,747.51 695.91,747.51 R12.2@696.03,747.39 ; v1(695.42,690.05) 696.03,690.66 R12.2@696.03,747.39 ; v1(695.48,718.09) 695.75,718.37 695.75,747.12 R12.2@696.03,747.39 ; v1(813.29,773.17) 814.05,773.94 814.05,785.58 826.2,797.72 v1(826.2,798.8) C4.2@856.6,798.8 ; C7.2@1194.37,1188.79 C20.1@1194.37,1238.79 1194.37,1254.64 ; R15.2@1213.77,771.21 R15.2@1214.76,771.21 ; v1(1258.44,767.32) 1248.06,756.94 ; 1284.76,752.72 1280.54,756.94 ; R7.2@1486.65,736.96 1485.67,736.96 1482.94,734.23 D5.2@1386.8,734.23 1303.25,734.23 1280.54,756.94 ; 1194.37,1254.64 v1(1194.37,1270.5) 1193.64,1271.23 v1(1165.77,1271.23) 1166.53,1270.46 1178.55,1270.46 1194.37,1254.64 ; R15.2@1214.76,771.21 1240.51,771.21 ; R15.2@1214.76,771.21 1216.57,769.4 1216.57,768.42 1236.14,748.84 1236.14,743.51 v1(1236.91,742.74) ; v1(1236.91,742.74) 1236.91,767.61 1240.51,771.21 ; v1(1236.91,742.74) 1237.67,743.51 1237.67,746.55 1248.06,756.94 ; 1240.51,771.21 1266.26,771.21 1280.54,756.94 ; 1248.06,756.94 1280.54,756.94
  Top Layer w30: v1@1271.19,894.1 1508.09,894.1 1529.83,872.36 1742.65,872.36 1784.27,913.98 1784.27,1230.36 1756.49,1258.14 1712.6,1258.14 P9.7@1711.51,1259.23
  Bottom Layer w25: v1@827.2,798.8 v1@826.43,798.04 ; v1@1260.75,766.02 1260.71,766.06 1260.71,768.67 1273.08,781.04 1273.08,858.36 ; v1@1260.95,765.82 1237.89,742.76 1215.46,720.33 1215.46,719.24 1170.06,673.84 848.9,673.84 ; 710.44,704.07 724.46,718.09 ; 710.44,704.07 696.42,690.05 696.42,718.03 696.48,718.09 724.46,718.09 ; 710.44,704.07 804.63,704.07 ; 724.46,718.09 768.55,718.09 ; 768.55,718.09 790.61,718.09 ; 768.55,718.09 790.61,740.15 ; 790.61,718.09 790.61,740.15 ; 790.61,718.09 804.63,704.07 ; 790.61,740.15 790.61,749.49 ; 790.61,749.49 797.87,756.76 ; 790.61,749.49 790.61,762.22 v1@826.43,798.04 ; 797.87,756.76 814.29,773.17 814.29,774.26 826.43,786.4 v1@826.43,798.04 ; 797.87,756.76 797.87,724.87 848.9,673.84 ; 804.63,704.07 834.86,673.84 848.9,673.84 ; 1195.37,1242.63 1166.77,1271.23 1194.64,1271.23 1195.37,1270.5 1195.37,1242.63 ; 1195.37,1242.63 1195.37,1120.29 1273.08,1042.58 1273.08,929.1 ; 1273.08,858.36 1273.08,894.1 1273.08,929.1 ; 1273.08,858.36 1290.76,876.04 ; 1273.08,929.1 1290.76,911.41 ; 1290.76,876.04 1308.45,893.73 1290.76,911.41 ; 1290.76,876.04 1290.76,911.41
  Bottom Layer w30: P9.8@1611.51,1259.23 P9.7@1711.51,1259.23 1881.12,1259.23 1981.12,1159.23 P11.5@2037.77,1159.23
  other v1: 1307.45,893.73 1275.19,894.1
VDDA: C10.1 R12.1 U3.14 | length 275.6
  Top Layer w8: C10.1@709.7,919.7 709.7,942.16 742.77,975.23 U3.14@777.42,975.23
  Top Layer w20: R12.1@696.03,780.86 696.03,798.95 674.21,820.77 674.21,904.2 685.93,915.92 C10.1@708.71,915.92
VIO: C1.2 C3.2 C21.2 P11.1 R2.1 R3.1 R15.1 R24.2 U3.32 U3.64 | length 4304
  Top Layer w8: C3.2@790.46,1288.68 816.46,1288.68 836.48,1268.66 U3.64@836.48,1239.01 ; U3.32@1072.7,884.68 1072.7,850.28 1082.46,840.52 C1.2@1082.46,804.68
  Top Layer w20: v1(758.43,1262.71) 758.43,1277.47 ; v1(762.03,1289.68) v1@762.03,1288.68 ; C3.2@790.46,1288.68 v1@769.64,1288.68 ; C1.2@1082.46,804.68 C21.2@1137.46,804.68 1175.62,804.68 ; v1(1175.89,887.93) 1175.13,887.16 1175.13,884.34 1174.75,883.96 v1(1174.75,859.83) 1174.75,805.55 1175.62,804.68 ; R2.1@1693.43,673.15 1693.43,709.33 1727.8,743.7 v3(1807.17,743.7) 1959.73,743.7 2027.48,675.94 2027.48,674.96 2029.29,673.15 R3.1@2030.28,673.15 ; v3(2233.01,718.16) 2233.01,271.58 2317.31,187.28 R24.2@2348.57,187.28 ; 758.43,1277.47 v1@769.64,1288.68 ; 758.43,1277.47 758.43,1284.99 762.03,1288.6 v1@762.03,1288.68 ; v1@762.03,1288.68 v1@769.64,1288.68 ; 1175.62,804.68 R15.1@1213.77,804.68 1289.53,804.68 ; 1289.53,804.68 v1(1320.67,773.54) v1(1320.67,804.16) 1320.15,804.68 1289.53,804.68
  Top Layer w30: v1(1838.71,957.01) 1838.71,1281.58 1916.37,1359.23 P11.1@2037.77,1359.23
  Bottom Layer w20: v1@762.03,1288.68 762.03,984.75 846.77,900 1162.73,900 1174.81,887.93 v1(1175.89,887.93) ; v1(1174.75,859.83) 1175.1,860.18 v1@1175.1,887.93 ; v3(1807.17,743.7) 1825.76,743.7 ; 1808.65,760.81 1825.76,743.7 ; 1831.81,743.7 1825.76,743.7 ; v3(2233.01,718.16) 2207.47,743.7 1825.76,743.7
  Bottom Layer w30: 1804.03,785.31 1785.18,804.16 ; v3(1807.17,743.7) 1807.07,743.79 1807.07,804.16 ; v1@1838.71,986.94 v1(1838.71,957.01) 1838.71,838.95 1807.07,807.31 1807.07,804.16 ; 1351.29,804.16 1785.18,804.16 ; 1351.29,804.16 v1(1320.67,773.54) v1(1320.67,804.16) 1351.29,804.16 ; 1785.18,804.16 1807.07,804.16
  other v1: 1838.98,986.94
VREF+: R17.2 U3.13 | length 293.9
  Top Layer w8: R17.2@646.72,780.98 R17.2@648.01,782.26 ; R17.2@650.01,782.26 650.01,915.83 725.15,990.98 U3.13@777.42,990.98
X32KI: C5.1 R18.1 U3.3 Y2.1 | length 437.5
  Top Layer w8: R18.1@421.59,1280.22 507.57,1280.22 Y2.1@516.59,1289.24 619.5,1289.24 628.09,1280.64 628.09,1247.24 726.88,1148.46 U3.3@777.42,1148.46
X32KO: C6.1 R19.2 U3.4 Y2.2 | length 407
  Top Layer w8: R19.2@436.86,1190.81 Y2.2@516.59,1190.81 520.72,1190.81 547.57,1163.95 617.29,1163.95 628.09,1174.76 C6.1@628.09,1198.4 635.78,1190.71 645.98,1190.71 704.01,1132.68 U3.4@756.39,1132.68 ; U3.4@756.42,1132.71 U3.4@777.42,1132.71
XI: C2.2 R20.2 U3.5 Y1.1 | length 445.7
  Top Layer w8: R20.2@373.8,1091.64 437.37,1091.64 Y1.1@440.12,1088.89 ; Y1.1@441.2,1091.4 476.39,1126.59 601.55,1126.59 607.17,1120.97 C2.2@607.17,1096.6 ; C2.2@612.39,1102.49 640.68,1102.49 655.16,1116.96 U3.5@777.42,1116.96
XO: C8.2 R21.2 U3.6 Y1.3 | length 376.1
  Top Layer w8: R21.2@512.13,929.07 514.92,931.86 Y1.3@514.92,998.34 525.25,1008.67 590.03,1008.67 612.39,1031.03 C8.2@612.39,1050.5 ; C8.2@621.53,1054.72 631.39,1054.72 677.88,1101.21 U3.6@777.42,1101.21
pads on no net: P5.A6 P5.A7 P5.A8 P5.B6 P5.B7 P5.B8 P7.A8 P7.B8 S3.0 S3.2 U1.2 U1.3 U2. U3.0

## Polygon pours and split planes (outlines as drawn)
GND on Top Layer "GND" (solid, remove dead copper, pour order 0): -0.82,2762.19 -0.82,-2.69 3068.63,-2.69 3068.63,2754.23
GND on Bottom Layer "GND" (solid, remove dead copper, pour order 1): -9.11,2761.83 -9.11,1.26 3076.53,1.26 3076.53,2756.83

## Keep-outs
Keep-Out Layer:
  the board outline again, w10

## Other copper
Top Layer:
  rectangle net GND: 2596.89,1050.15 2621.71,1104.56
  rectangle net GND: 2346.73,1088.51 2690.73,1161.76
  pour cut-out: 2603.07,1045.48 2652.84,1045.48 2662.61,1035.71 2662.61,994.13 2657.88,989.4 2599.92,989.4 2596.45,992.87 2596.45,1044.22
  region net +5V: 2751.06,1445.03 2758.16,1452.13 2817.08,1452.13 2822.78,1446.42 2822.78,1273.31 2831.89,1264.2 2892.33,1264.2 2906.26,1278.13 2906.26,1865.01 2871.6,1899.66 2456.58,1899.66 2447.9,1908.34 2447.9,2001.99 2459.39,2013.47 2979.77,2013.47 2998.88,1994.36 2998.88,1122.2 2983.36,1106.69 2757.43,1106.69 2751.06,1113.06
  region net NetC17_2: 2556.97,1169.83 2581.86,1169.83 2586.52,1174.5 2586.52,1209.69 2596.31,1219.48 2596.31,1454.26 2586.99,1463.58 2542.08,1463.58 2515.72,1437.22 2515.72,1273.69 2554.54,1234.88 2554.54,1171.64
  region net VBUS_CC: 2542.28,1171.66 2366.64,1171.66 2339.72,1198.58 2339.72,1342.34 2268.08,1413.98 2268.08,1829.85 2325.7,1829.85 2370.1,1785.46 2370.1,1451.16 2429.96,1391.3 2429.96,1252.09 2447.33,1234.73 2535.1,1234.73 2544.58,1225.25 2544.58,1173.76
  pour cut-out: 1864.47,1270.71 1864.47,1211.27 1928.21,1211.27 1928.21,1271.38
  pour cut-out: 2542.67,1536.95 2542.67,1284.04 2809.94,1284.04 2809.94,1536.95

## Silkscreen, mask and mechanical layers (free items; w line width, h text height)
Top Overlay:
  lines w10: 2451.79,1642.44 2451.79,1664.97 ; 2451.79,1897.68 2451.79,1920.21 ; 2551.79,1642.44 2551.79,1664.97 ; 2551.79,1897.68 2551.79,1920.21
  text "ON" at 2510.74,2452.05 h35
  text "OFF" at 2678.62,2452.05 h35
  text "USBFS" at 1237.35,2194.96 h78.74
  text "USBHS" at 495.05,2078.86 h78.74
  text "PC12" at 911.26,2028.16 h35 r270
  text "PC10" at 1011.32,2028.16 h35 r270
  text "PA14" at 1111.37,2028.16 h35 r270
  text "PA12" at 1211.43,2028.16 h35 r270
  text "PB14" at 1711.71,2028.16 h35 r270
  text "PB12" at 1811.77,2028.16 h35 r270
  text "PA11" at 1311.49,2016.49 h35 r270
  text "GND" at 310.92,1999 h35 r270
  text "GND" at 410.98,1999 h35 r270
  text "PB9" at 511.03,1999 h35 r270
  text "PB8" at 611.09,1999 h35 r270
  text "PB5" at 711.15,1999 h35 r270
  text "PB4" at 811.2,1999 h35 r270
  text "PA9" at 1411.54,1999 h35 r270
  text "PC8" at 1511.6,1999 h35 r270
  text "PC6" at 1611.65,1999 h35 r270
  text "GND" at 1911.82,1999 h35 r270
  text "VCC" at 2011.88,1999 h35 r270
  text "VCC" at 2111.94,1999 h35 r270
  text "+5V" at 2448.02,1940.4 h35
  text "GND" at 2610.71,1891.22 h35
  text "GND" at 310.92,1662.41 h35 r270
  text "GND" at 410.98,1662.41 h35 r270
  text "PE0" at 511.03,1662.41 h35 r270
  text "PB6" at 611.09,1662.41 h35 r270
  text "PB7" at 711.15,1662.41 h35 r270
  text "PB3" at 811.2,1662.41 h35 r270
  text "PD2" at 911.26,1662.41 h35 r270
  text "PC11" at 1011.32,1662.41 h35 r270
  text "PA15" at 1111.37,1662.41 h35 r270
  text "PA13" at 1211.43,1662.41 h35 r270
  text "PA10" at 1311.49,1662.41 h35 r270
  text "PA8" at 1411.54,1662.41 h35 r270
  text "PC9" at 1511.6,1662.41 h35 r270
  text "PC7" at 1611.65,1662.41 h35 r270
  text "PB15" at 1711.71,1662.41 h35 r270
  text "PB13" at 1811.77,1662.41 h35 r270
  text "GND" at 1911.82,1662.41 h35 r270
  text "VCC" at 2011.88,1662.41 h35 r270
  text "VCC" at 2111.94,1662.41 h35 r270
  text "GND" at 2610.71,1616.93 h35
  text "VBUS_CC" at 2373,1589.35 h35
  text "CH32V205RCT-R0-1v1" at 37.46,1363.42 h35 r270
  text "3V3" at 2200.65,1346.74 h35
  text "VIO" at 1893.89,1342.11 h35
  text "+5V" at 1439.92,1335.88 h35
  text "+5V" at 1762.77,1335.11 h35
  text "VDD" at 1762.77,1260.57 h35
  text "3V3" at 2200.65,1249.43 h35
  text "VDD" at 1439.92,1235.82 h35
  text "VBAT" at 1853.07,1219.17 h35
  text "GND" at 1762.77,1138.01 h35
  text "VDD" at 1888.06,1136.88 h35
  text "GND" at 1439.92,1135.76 h35
  text "3V3" at 2199.41,1131.06 h35
  text "3V3" at 1935.71,1103.18 h35 r270
  text "RXD" at 1439.92,1035.71 h35
  text "SWIO" at 1762.77,1032 h35
  text "VBUS_CC" at 2214.29,1021.26 h35
  text "GND" at 1935.71,995.65 h35 r270
  text "TXD" at 1439.92,935.65 h35
  text "SWCK" at 1762.77,935.65 h35
  text "+5V" at 2210.69,933.88 h35
  text "GND" at 1935.71,875.72 h35 r270
  text "+5V" at 2210.69,840.28 h35
  text "BOOT1" at 1909.85,546.66 h35 r270
  text "NRST" at 712.51,523.33 h35 r270
  text "PC14" at 512.95,517.5 h35 r270
  text "PB10" at 1610.52,517.5 h35 r270
  text "LED1" at 1710.3,511.67 h35 r270
  text "GND" at 313.4,488.34 h35 r270
  text "KEY" at 413.18,488.34 h35 r270
  text "PD0" at 612.73,488.34 h35 r270
  text "PC3" at 912.07,488.34 h35 r270
  text "PA3" at 1111.62,488.34 h35 r270
  text "PA5" at 1211.4,488.34 h35 r270
  text "PA7" at 1311.18,488.34 h35 r270
  text "PC5" at 1410.96,488.34 h35 r270
  text "GND" at 1810.07,488.34 h35 r270
  text "VCC" at 2009.63,488.34 h35 r270
  text "VCC" at 2109.41,488.34 h35 r270
  text "PC1" at 812.29,476.68 h35 r270
  text "PA1" at 1011.85,476.68 h35 r270
  text "PB1" at 1510.74,476.68 h35 r270
  text "GND" at 313.4,147 h35 r270
  text "PC13" at 413.18,147 h35 r270
  text "PC15" at 512.95,147 h35 r270
  text "PD1" at 612.73,147 h35 r270
  text "PC0" at 712.51,147 h35 r270
  text "PC2" at 812.29,147 h35 r270
  text "PA0" at 912.07,147 h35 r270
  text "PA2" at 1011.85,147 h35 r270
  text "PA4" at 1111.62,147 h35 r270
  text "PA6" at 1211.4,147 h35 r270
  text "PC4" at 1311.18,147 h35 r270
  text "PB0" at 1410.96,147 h35 r270
  text "PB2" at 1510.74,147 h35 r270
  text "PB11" at 1610.52,147 h35 r270
  text "LED2" at 1710.3,147 h35 r270
  text "GND" at 1810.07,147 h35 r270
  text "GND" at 1909.85,147 h35 r270
  text "VCC" at 2009.63,147 h35 r270
  text "VCC" at 2109.41,147 h35 r270
Mechanical 1:
  the board outline again, w10

## Text inside footprints (layer, text, board x,y; h text height)
LED1: Top Overlay "+" at 1817.25,720.51 h40
LED2: Top Overlay "+" at 1893.51,720.51 h40
P1: Top Overlay "D-" at 697.66,2362.44 h40 r180; Top Overlay "D+" at 607.66,2362.44 h40 r180; Top Overlay "V" at 777.66,2362.44 h40 r180; Top Overlay "G" at 497.66,2362.44 h40 r180
PWR: Top Overlay "+" at 2329.38,2132.01 h40 r270